# EAGLE board MCU Standard (EAGLE 9.6.2)
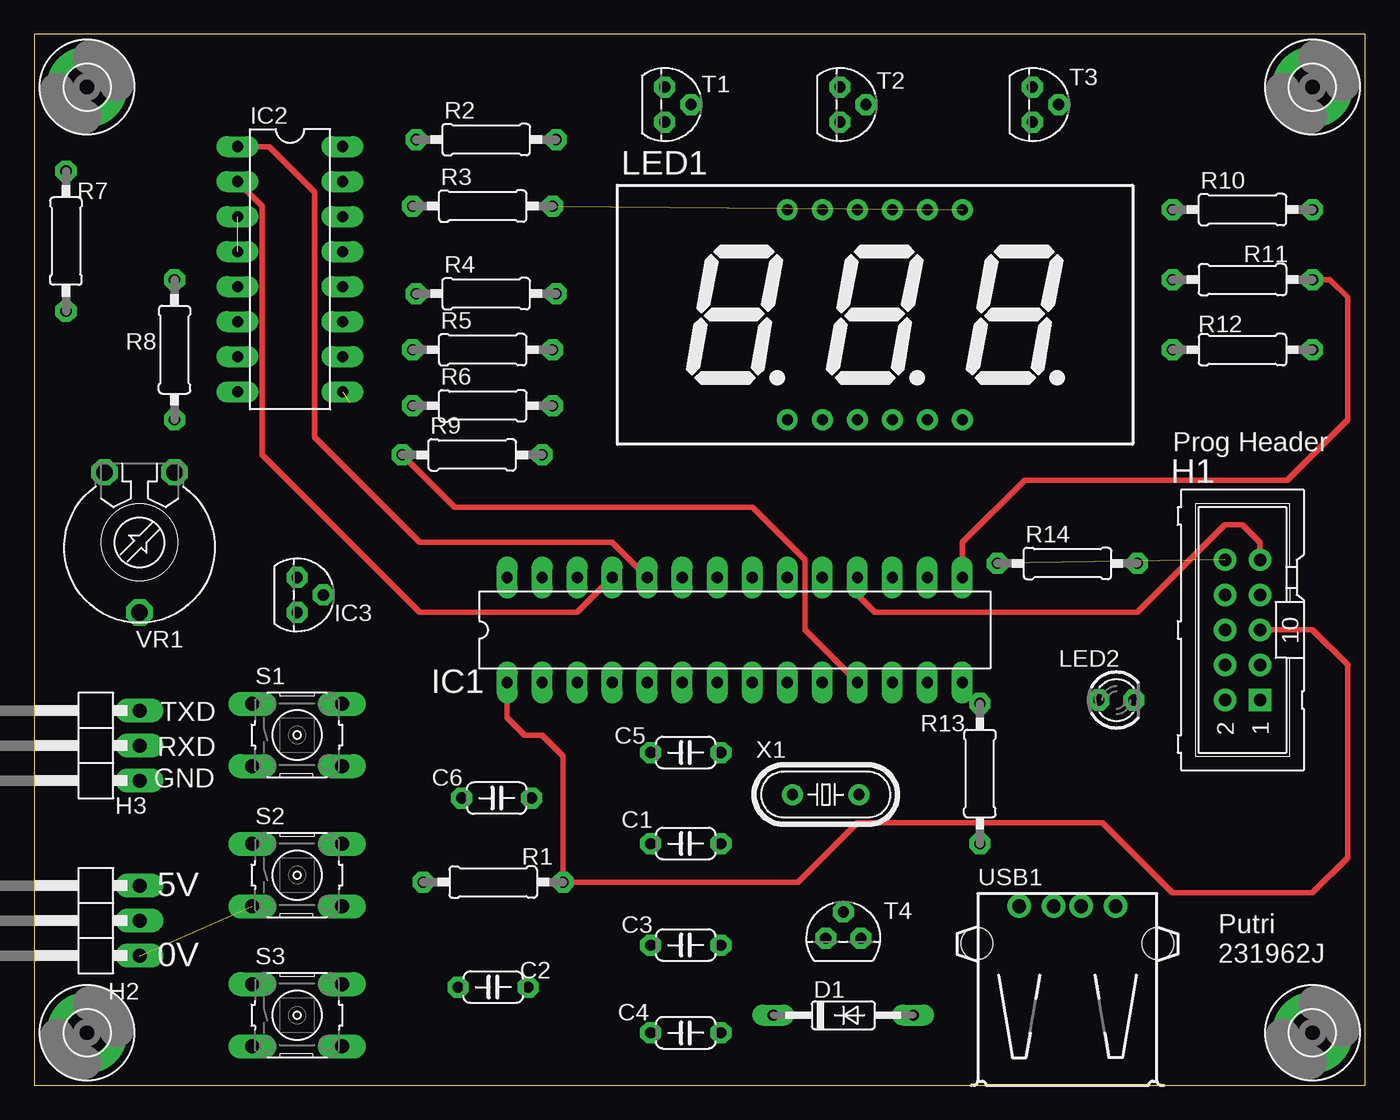
[diagram p0: board, top side]
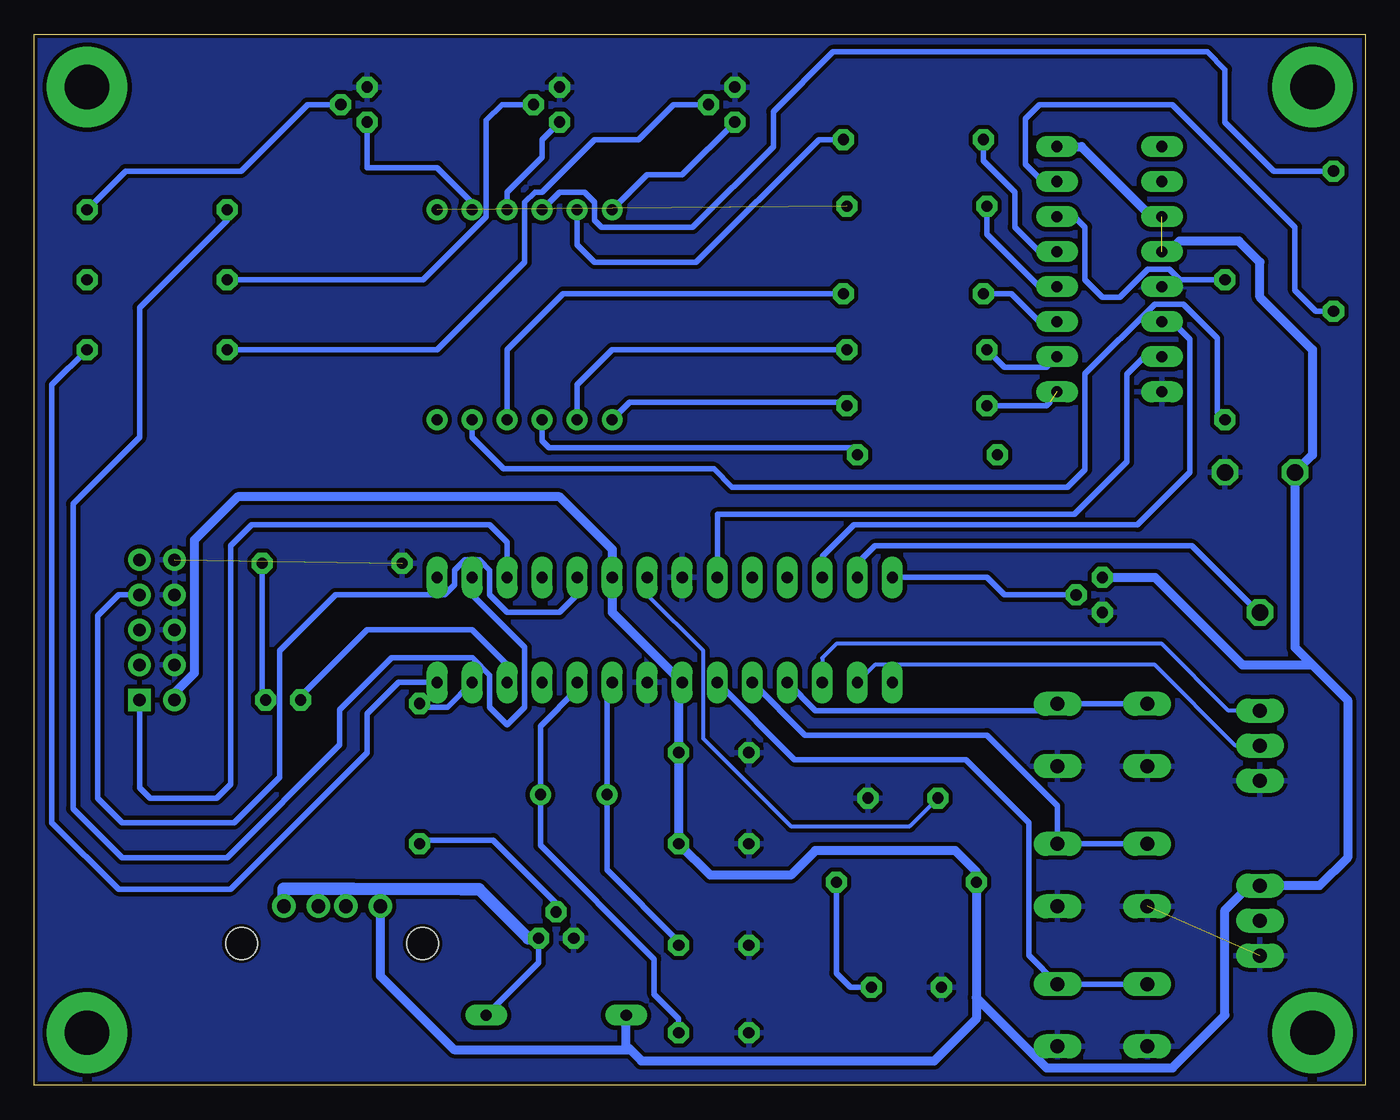
[diagram p1: board, bottom side, seen from below]

Size 96.52 x 76.2 mm. Coordinates in mm from the lower left corner, seen from the top.
Outline: 0,0 96.52,0 96.52,76.2 0,76.2 0,0
Copper layers (1*16): Top 0.035mm / dielectric 1.5mm / Bottom 0.035mm
Design rules "default *": minimum track width 12mil, minimum drill 0.35mm, track to track 12mil, track to pad 12mil, pad to pad 12mil, via to via 12mil, smd to smd 12mil, copper to edge 10mil, drill to drill 6mil, minimum pad ring 14mil, minimum via ring 8mil, stop-mask expansion 4mil, vias tented up to drill 0mil, thermal gap 12mil
Net classes: 1 Power: width 0.635 mm; 2 Signal: width 0.406 mm

## Footprints (pad centres in the part's own frame; a part is rotated, then mirrored left to right if it is on the bottom)
C050-024X044 = drill 0.813 octagon: 1 -2.54,0; 2 2.54,0
DO35-10 = drill 0.813 long: A 5.08,0; C -5.08,0
IDC-10V = drill 0.9 pad 1.5 square: 1 -5.08,-1.27 | drill 0.9 pad 1.5: 2 -5.08,1.27; 3 -2.54,-1.27; 4 -2.54,1.27; 5 0,-1.27; 6 0,1.27; 7 2.54,-1.27; 8 2.54,1.27; 9 5.08,-1.27; 10 5.08,1.27
1X03/90 = drill 1.016 long: 1 -2.54,-3.81; 2 0,-3.81; 3 2.54,-3.81
DIL28-3 = drill 0.813 long: 1 -16.51,-3.81; 2 -13.97,-3.81; 3 -11.43,-3.81; 4 -8.89,-3.81; 5 -6.35,-3.81; 6 -3.81,-3.81; 7 -1.27,-3.81; 8 1.27,-3.81; 9 3.81,-3.81; 10 6.35,-3.81; 11 8.89,-3.81; 12 11.43,-3.81; 13 13.97,-3.81; 14 16.51,-3.81; 15 16.51,3.81; 16 13.97,3.81; 17 11.43,3.81; 18 8.89,3.81; 19 6.35,3.81; 20 3.81,3.81; 21 1.27,3.81; 22 -1.27,3.81; 23 -3.81,3.81; 24 -6.35,3.81; 25 -8.89,3.81; 26 -11.43,3.81; 27 -13.97,3.81; 28 -16.51,3.81
DIL16 = drill 0.813 long: 1 -8.89,-3.81; 2 -6.35,-3.81; 3 -3.81,-3.81; 4 -1.27,-3.81; 5 1.27,-3.81; 6 3.81,-3.81; 7 6.35,-3.81; 8 8.89,-3.81; 9 8.89,3.81; 10 6.35,3.81; 11 3.81,3.81; 12 1.27,3.81; 13 -1.27,3.81; 14 -3.81,3.81; 15 -6.35,3.81; 16 -8.89,3.81
TO92 = drill 0.813 octagon: 1 1.27,0; 2 0,1.905; 3 -1.27,0
BX56/BX55 = drill 0.8 pad 1.422: 1 -6.35,-7.62; 2 -3.81,-7.62; 3 -1.27,-7.62; 4 1.27,-7.62; 5 3.81,-7.62; 6 6.35,-7.62; 7 6.35,7.62; 8 3.81,7.62; 9 1.27,7.62; 10 -1.27,7.62; 11 -3.81,7.62; 12 -6.35,7.62
LED3MM = drill 0.813 octagon: A -1.27,0; K 1.27,0
3,2-PAD = drill 3.2 pad 5.842: B3,2 0,0
0207/10 = drill 0.813 octagon: 1 -5.08,0; 2 5.08,0
B3F-10XX = drill 1.016 long: 1 -3.251,2.261; 2 3.251,2.261; 3 -3.251,-2.261; 4 3.251,-2.261
USB = drill 1: 1 -3.5,12.99; 2 -1,12.99; 3 1,12.99; 4 3.5,12.99 | hole 2.3: -6.57,10.28; 6.57,10.28
PT-10 = drill 1.2 pad 1.778 octagon: 1 -2.54,-5.08; 2 2.54,-5.08; 3 0,5.08
HC49/S = drill 0.813: 1 -2.413,0; 2 2.413,0

## Placement (x,y rotation side)
C1  100nF  [C050-024X044]  47.24,17.53 180 top
C2  10uF  [C050-024X044]  33.27,7.11 180 top
C3  18pF  [C050-024X044]  47.24,10.16 180 top
C4  18pF  [C050-024X044]  47.24,3.81 180 top
C5  100nF  [C050-024X044]  47.24,24.13 180 top
C6  100nF  [C050-024X044]  33.53,20.83 0 top
D1  1N4148DO35-10  [DO35-10]  58.67,5.08 0 top
H1  [IDC-10V]  87.63,33.02 90 top
H2  [1X03/90]  3.81,11.94 90 top
H3  [1X03/90]  3.81,24.64 90 top
IC1  ATmega328P  [DIL28-3]  50.8,33.02 0 top
IC2  4511N  [DIL16]  18.54,59.18 270 top
IC3  LM35C  [TO92]  19.05,35.56 270 top
LED1  LT0565  [BX56/BX55]  60.96,55.88 0 top
LED2  [LED3MM]  78.49,27.94 0 top
MP1  MOUNT-PAD-ROUND3.2  [3,2-PAD]  92.71,72.39 0 top
MP2  MOUNT-PAD-ROUND3.2  [3,2-PAD]  92.71,3.81 0 top
MP3  MOUNT-PAD-ROUND3.2  [3,2-PAD]  3.81,3.81 0 top
MP4  MOUNT-PAD-ROUND3.2  [3,2-PAD]  3.81,72.39 0 top
R1  10k  [0207/10]  33.27,14.73 180 top
R2  330R  [0207/10]  32.77,68.58 0 top
R3  330R  [0207/10]  32.51,63.75 0 top
R4  330R  [0207/10]  32.77,57.4 0 top
R5  330R  [0207/10]  32.51,53.34 0 top
R6  330R  [0207/10]  32.51,49.28 0 top
R7  330R  [0207/10]  2.29,61.21 90 top
R8  330R  [0207/10]  10.16,53.34 270 top
R9  330R  [0207/10]  31.75,45.72 0 top
R10  1k  [0207/10]  87.63,63.5 0 top
R11  1k  [0207/10]  87.63,58.42 180 top
R12  1k  [0207/10]  87.63,53.34 180 top
R13  1k  [0207/10]  68.58,22.61 270 top
R14  1k  [0207/10]  74.93,37.85 0 top
S1  [B3F-10XX]  19.05,25.4 0 top
S2  [B3F-10XX]  19.05,15.24 0 top
S3  [B3F-10XX]  19.05,5.08 0 top
T1  2N3904  [TO92]  45.72,71.12 270 top
T2  2N3904  [TO92]  58.42,71.12 270 top
T3  2N3904  [TO92]  72.39,71.12 270 top
T4  MPSA14  [TO92]  58.67,10.67 0 top
USB1  [USB]  74.93,0 0 top
VR1  10k  [PT-10]  7.62,39.37 180 top
X1  10MHz  [HC49/S]  57.4,21.08 0 top

## Library data of the parts
C1-C6 D1 H1-H3 IC2 IC3 LED1 LED2 R1-R14 T1-T4 USB1 VR1 X1 = MCU Project
IC1 = MCU Project; OC_FARNELL: unknown; OC_NEWARK: unknown
MP1-MP4 = holes
S1-S3 = MCU Project; MPN: B3F-1000; OC_FARNELL: 176432; OC_NEWARK: 36M3542

## Nets
!RST [Signal]: C2.1 H1.5 IC1.1 R1.1
ADC4 [Signal]: IC1.27 VR1.3
ADC5 [Signal]: IC1.28 IC3.2
BCD0 [Signal]: IC1.23 IC2.7
BCD1 [Signal]: IC1.24 IC2.1
BCD2 [Signal]: IC1.25 IC2.2
BCD3 [Signal]: IC1.26 IC2.6
DP [Signal]: IC1.11 R9.1
EXT_USB [Signal]: IC1.13 R13.1
GND [Power]: C1.2 C2.2 C3.2 C4.2 C5.2 C6.2 H1.4 H1.6 H1.8 H1.10 H2.1 H3.1 IC1.8 IC1.22 IC2.5 IC2.8 IC3.1 R14.1 S1.3 S1.4 S2.3 S2.4 S3.3 S3.4 T1.3 T2.3 T3.3 T4.3 VR1.1
LED [Signal]: IC1.12 LED2.A
MISO [Signal]: H1.9 IC1.18
MOSI [Signal]: H1.1 IC1.17
MUX1 [Signal]: IC1.14 R12.1
MUX2 [Signal]: IC1.15 R11.1
MUX3 [Signal]: IC1.16 R10.1
N$1 [Signal]: C3.1 IC1.9 X1.1
N$2 [Signal]: C4.1 IC1.10 X1.2
N$3 [Signal]: LED1.5 R8.2
N$4 [Signal]: LED1.10 R7.2
N$5 [Signal]: LED1.1 R6.2
N$6 [Signal]: LED1.2 R5.2
N$7 [Signal]: LED1.4 R4.2
N$8 [Signal]: LED1.7 R3.2
N$9 [Signal]: LED1.11 R2.2
N$10 [Signal]: IC2.13 R2.1
N$11 [Signal]: IC2.12 R3.1
N$12 [Signal]: IC2.11 R4.1
N$13 [Signal]: IC2.10 R5.1
N$14 [Signal]: IC2.9 R6.1
N$15 [Signal]: IC2.15 R7.1
N$16 [Signal]: IC2.14 R8.1
N$17 [Signal]: LED1.3 R9.2
N$18: C6.1 IC1.21
N$19 [Signal]: LED1.8 T3.1
N$24 [Signal]: LED1.9 T2.1
N$25 [Signal]: LED1.12 T1.1
N$26 [Signal]: R10.2 T3.2
N$27 [Signal]: R11.2 T2.2
N$28 [Signal]: R12.2 T1.2
N$33 [Signal]: R13.2 T4.2
N$35 [Signal]: D1.A T4.1 USB1.4
N$37 [Signal]: LED2.K R14.2
RXD: H3.2 IC1.2
SCK [Signal]: H1.7 IC1.19
SW1 [Signal]: IC1.4 S1.1 S1.2
SW2 [Signal]: IC1.5 S2.1 S2.2
SW3 [Signal]: IC1.6 S3.1 S3.2
TXD: H3.3 IC1.3
VCC [Power]: C1.1 C5.1 D1.C H1.2 H2.3 IC1.7 IC1.20 IC2.3 IC2.4 IC2.16 IC3.3 R1.2 USB1.1 VR1.2

## Tracks (layer width: path | path; a pad name or v marks a point on that pad's centre or on a via)
!RST
  Top 0.406: IC1.1 34.29,26.67 35.56,25.4 36.83,25.4 38.35,23.88 R1.1 55.37,14.73 59.69,19.05 77.47,19.05 82.55,13.97 92.71,13.97 95.25,16.51 95.25,30.48 92.71,33.02 H1.5
  Bottom 0.406: R1.1 38.35,8.13 37.34,7.11 C2.1
ADC4
  Bottom 0.406: IC1.27 36.83,37.85 35.56,39.12 12.57,39.12 7.75,34.29 VR1.3
ADC5
  Bottom 0.406: IC3.2 26.16,35.56 27.43,36.83 IC1.28
BCD0
  Bottom 0.406: IC2.7 16,52.83 17.27,51.56 17.27,45.21 21.08,41.4 46.99,41.4 IC1.23
BCD1
  Top 0.406: IC2.1 17.02,68.07 20.32,64.77 20.32,46.99 27.94,39.37 41.91,39.37 IC1.24
BCD2
  Top 0.406: IC2.2 16.51,63.75 16.51,45.72 27.94,34.29 39.37,34.29 IC1.25
BCD3
  Bottom 0.406: IC2.6 13.97,55.37 12.7,54.1 12.7,44.45 16.51,40.64 37.08,40.64 39.37,38.35 IC1.26
DP
  Top 0.406: R9.1 30.48,41.91 52.07,41.91 55.88,38.1 55.88,33.02 IC1.11
EXT_USB
  Bottom 0.406: IC1.13 66.55,27.43 68.33,27.43 R13.1
GND  (2 unrouted)
  Bottom 0.635: 44.7,24.38 C5.2
  pour Bottom: 0,76.2 96.52,76.2 96.52,0 0,0
LED
  Bottom 0.406: IC1.12 62.23,30.48 64.77,33.02 72.39,33.02 77.22,28.19 LED2.A
MISO
  Top 0.406: H1.9 88.9,39.37 87.63,40.64 86.36,40.64 80.01,34.29 60.96,34.29 59.69,35.56 IC1.18
MOSI
  Bottom 0.406: IC1.17 62.23,39.37 63.5,40.64 80.77,40.64 82.3,39.12 82.3,21.84 83.31,20.83 88.14,20.83 88.9,21.59 H1.1
MUX1
  Bottom 0.406: R12.1 95.25,50.8 95.25,19.05 90.42,14.22 82.3,14.22 72.39,24.13 72.39,26.94 70.12,29.21 IC1.14
MUX2
  Top 0.406: R11.1 93.98,58.42 95.25,57.15 95.25,48.26 90.88,43.89 71.83,43.89 67.31,39.37 IC1.15
MUX3
  Bottom 0.406: R10.1 82.55,62.74 88.9,56.39 88.9,46.99 93.73,42.16 93.73,20.07 90.17,16.51 82.55,16.51 74.37,24.69 74.37,27.24 70.62,30.99 64.75,30.99 63.5,29.74 63.5,27.43 62.23,26.16 60.96,27.43 60.96,31.75 64.77,35.56 IC1.16
N$1
  Bottom 0.406: IC1.9 54.99,28.83 X1.1 54.99,15.62 49.78,10.41 C3.1
N$2
  Bottom 0.406: IC1.10 57.15,28.7 59.82,26.04 X1.2 59.82,17.4 51.56,9.14 51.56,6.6 49.78,4.83 C4.1
N$3
  Bottom 0.406: R8.2 10.72,48.82 10.72,54.17 13.19,56.64 15.26,56.64 20.32,51.58 20.32,44.65 21.59,43.38 45.92,43.38 47.24,44.7 62.48,44.7 64.77,46.99 LED1.5
N$4
  Bottom 0.406: R7.2 6.6,66.29 10.16,69.85 10.16,73.66 11.43,74.93 38.61,74.93 42.93,70.61 42.93,68.07 48.77,62.23 55.38,62.23 55.89,62.73 55.89,64.02 56.63,64.76 57.14,64.76 57.15,64.77 58.42,64.77 LED1.10
N$5
  Bottom 0.406: R6.2 37.85,49.53 53.34,49.53 LED1.1
N$6
  Bottom 0.406: LED1.2 57.15,50.8 54.61,53.34 R5.2
N$7
  Bottom 0.406: R4.2 58.17,57.4 62.23,53.34 LED1.4
N$8  (1 unrouted)
N$9
  Bottom 0.406: R2.2 39.62,68.58 48.51,59.69 55.88,59.69 57.15,60.96 LED1.11
N$10
  Bottom 0.406: R2.1 27.69,67.06 25.4,64.77 25.4,62.23 23.62,60.45 IC2.13
N$11
  Bottom 0.406: IC2.12 23.62,57.91 27.43,61.72 R3.1
N$12
  Bottom 0.406: R4.1 25.65,57.4 23.62,55.37 IC2.11
N$13
  Bottom 0.406: R5.1 26.16,52.07 23.11,52.07 IC2.10
N$14  (1 unrouted)
  Bottom 0.406: R6.1 23.11,49.28 22.86,49.53
N$15
  Bottom 0.406: R7.1 3.56,56.13 5.08,57.66 5.08,62.23 13.97,71.12 23.62,71.12 24.64,70.1 24.64,66.8 23.37,65.53 IC2.15
N$16
  Bottom 0.406: R8.1 13.44,58.42 14.21,59.18 15.75,59.18 17.78,57.15 19.05,57.15 20.32,58.42 20.32,62.23 21.08,62.99 IC2.14
N$17
  Bottom 0.406: LED1.3 59.69,46.74 59.18,46.23 37.34,46.23 R9.2
N$18
  Bottom 0.305: C6.1 33.02,18.8 41.66,18.8 48.01,25.15 48.01,31.5 52.07,35.56 IC1.21
N$19
  Bottom 0.406: T3.1 72.39,66.55 67.31,66.55 64.77,64.01 LED1.8
N$24
  Bottom 0.406: T2.1 59.69,68.58 59.69,67.31 62.23,64.77 LED1.9
N$25
  Bottom 0.406: T1.1 49.53,66.04 52.07,66.04 LED1.12
N$26
  Bottom 0.406: T3.2 76.71,71.12 81.53,66.29 89.92,66.29 R10.2
N$27
  Bottom 0.406: T2.2 62.61,71.12 63.75,69.98 63.75,62.99 68.33,58.42 R11.2
N$28
  Bottom 0.406: T1.2 50.16,71.12 52.7,68.58 55.88,68.58 59.7,64.76 60.21,64.76 60.96,64.02 60.96,59.69 67.31,53.34 R12.2
N$33
  Bottom 0.406: T4.2 58.67,13.21 63.25,17.78 68.33,17.78 R13.2
N$35
  Bottom 0.406: T4.1 59.94,8.89 D1.A
  Bottom 0.889: USB1.4 78.43,14.24 73.41,14.24 65.53,14.22 64.26,14.22 60.71,10.67 T4.1
N$37
  Bottom 0.406: R14.2 80.01,28.19 LED2.K
RXD
  Bottom 0.305: H3.2 9.4,24.64 15.24,30.48 35.56,30.48 IC1.2
SCK
  Bottom 0.406: H1.7 90.42,35.56 91.95,34.04 91.95,20.83 90.17,19.05 82.04,19.05 78.74,22.35 78.74,31.5 74.68,35.56 66.78,35.56 66.04,36.3 66.04,37.36 65.3,38.1 64.24,38.1 63.5,37.36 63.5,35.56 62.23,34.29 58.42,34.29 57.15,35.56 IC1.19
SW1
  Bottom 0.406: IC1.4 39.85,27.15 22.81,27.15 S1.2 S1.1
SW2
  Bottom 0.406: IC1.5 40.64,25.4 27.43,25.4 22.3,20.27 22.3,17.53 | 22.3,17.53 S2.2 | S2.1 22.28,17.5 22.3,17.53
SW3
  Bottom 0.406: IC1.6 41.4,23.62 28.96,23.62 24.38,19.05 24.38,9.42 S3.2 S3.1
TXD
  Bottom 0.305: IC1.3 39.37,30.99 38.35,32 14.73,32 9.91,27.18 H3.3
VCC  (1 unrouted)
  Bottom 0.635: IC3.3 15.24,36.83 8.89,30.48 3.81,30.48 | 3.81,30.48 1.27,27.94 1.27,16.51 3.3,14.48 H2.3 8.38,14.48 10.16,12.7 10.16,5.08 13.97,1.27 23.11,1.27 28.19,6.35 | 28.19,6.35 R1.2 28.19,15.49 29.72,17.02 39.88,17.02 41.66,15.24 47.5,15.24 C1.1 C5.1 49.78,28.96 IC1.7 54.61,34.29 IC1.20 54.61,38.86 58.42,42.67 81.79,42.67 84.93,39.53 84.93,29.89 86.36,28.46 H1.2 | 28.19,6.35 28.19,4.83 31.24,1.78 52.49,1.78 53.3,2.58 | IC2.16 20.57,68.07 15.49,62.99 IC2.3 | IC2.4 14.22,60.45 13.46,61.21 9.14,61.21 7.62,59.69 7.62,57.15 3.81,53.34 3.81,45.72 VR1.2 5.08,31.75 3.81,30.48 | 53.3,2.58 53.59,2.88 D1.C | 53.3,2.58 66.08,2.58 71.43,7.93 USB1.1

## Text on the board
tPlace: Prog Header | TXD | RXD | GND | 5V | 0V | Putri / 231962J
200bmp: C:/Users/pvncs/Downloads/turtle.bmp